# Altium PCB Guitar_Headphone_Amp.PcbDoc
Units mm, origin at the board's own origin, x right, y up, seen from the top; angles counter-clockwise.
Board outline 37.47 x 55.24 mm, 2 copper layers (Top Layer, Bottom Layer); 34 components, 23 nets, 93 pads, 6 vias.
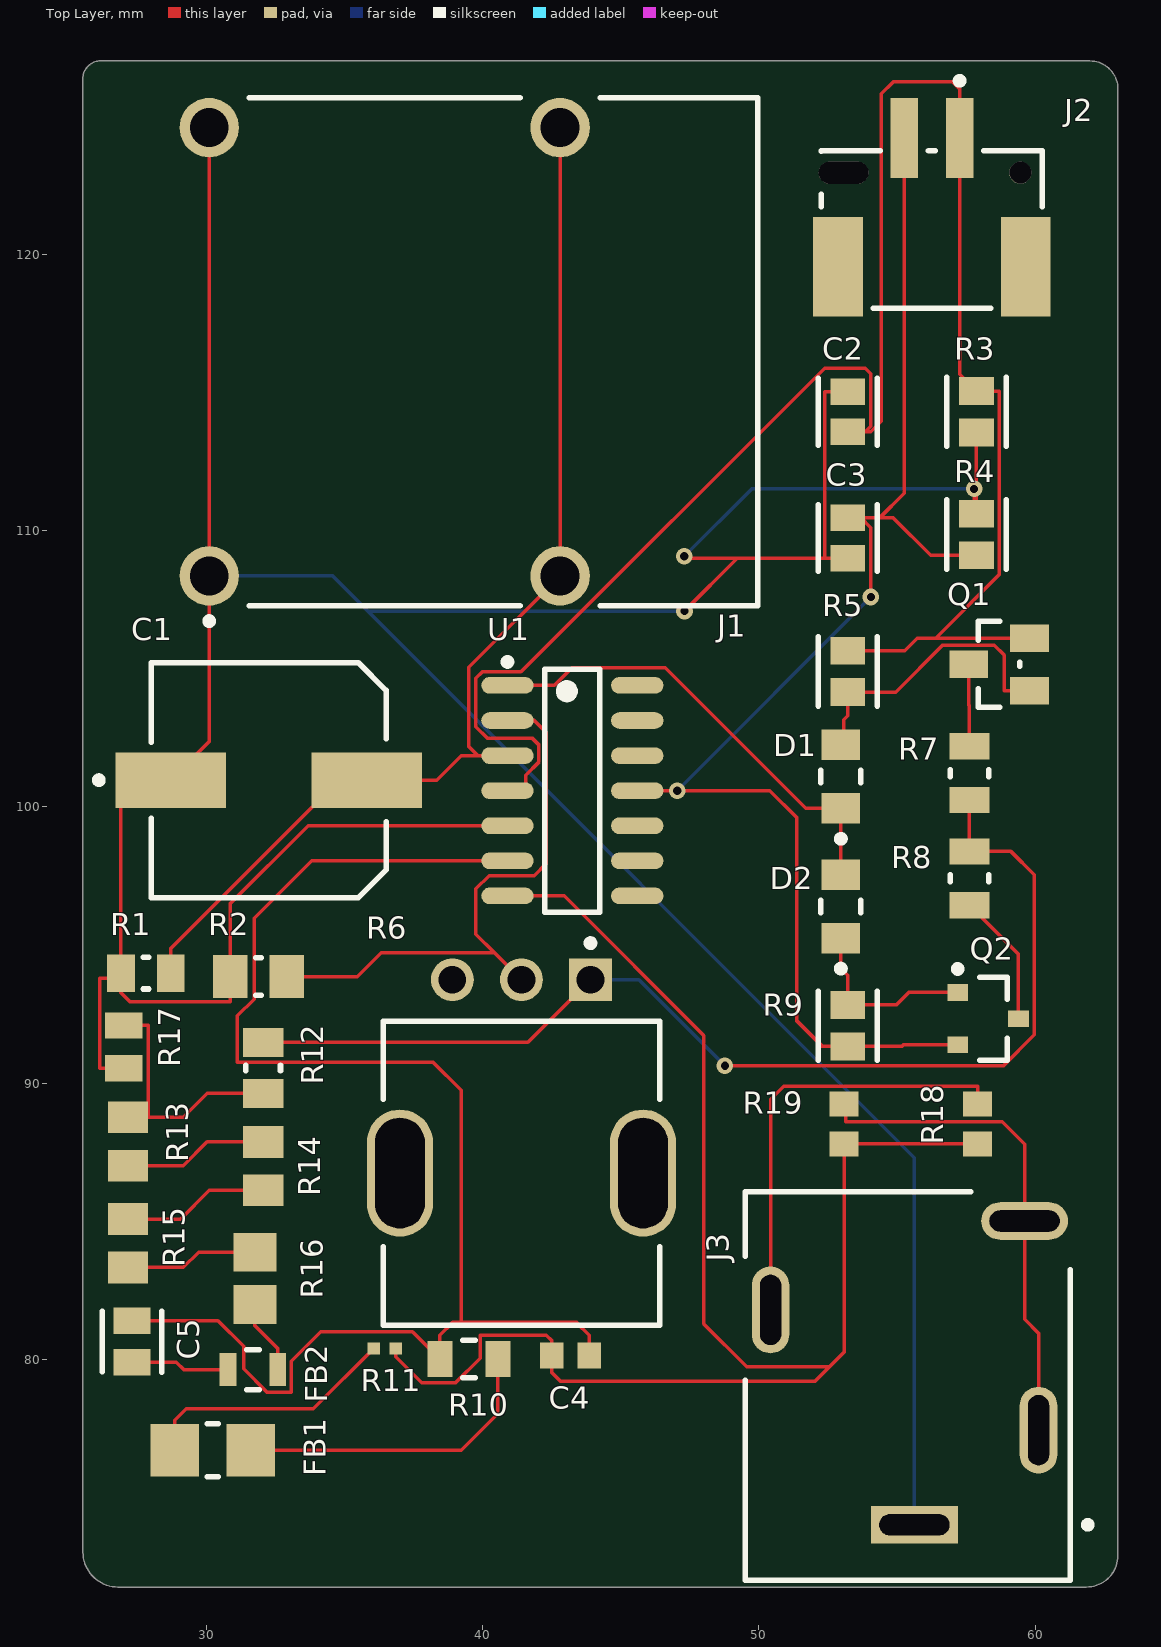
[diagram p0: Top Layer view]
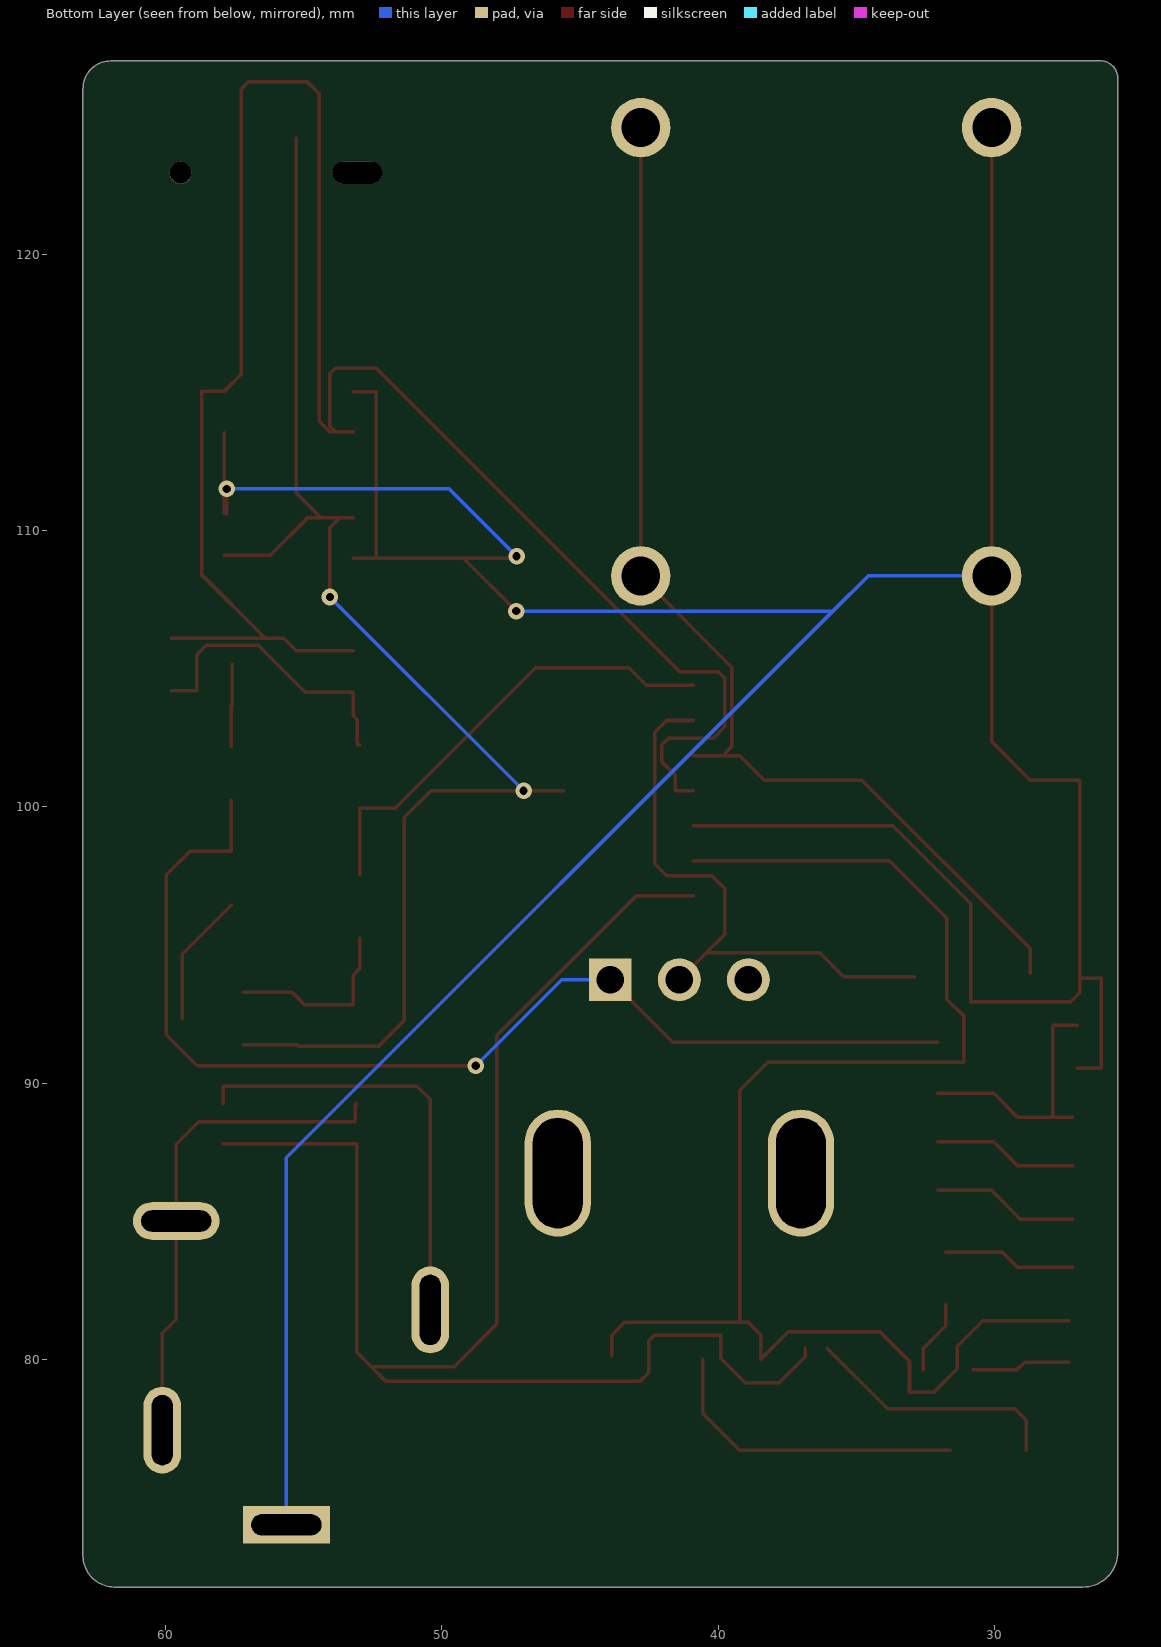
[diagram p1: Bottom Layer view, seen from below]
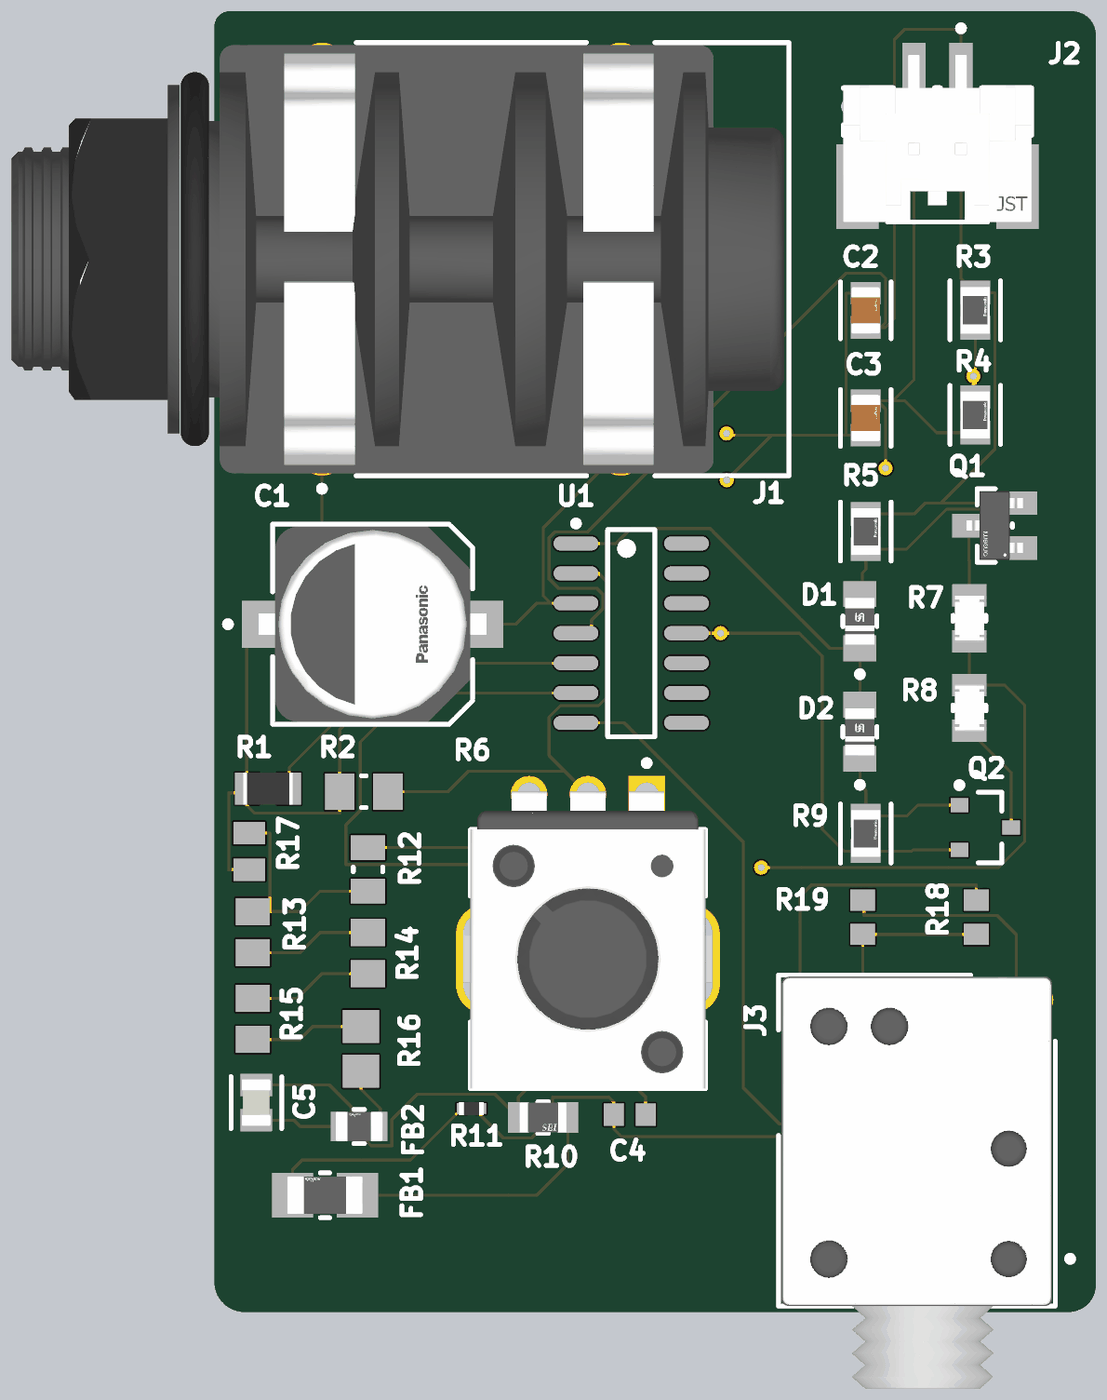
[diagram p2: 3D render of the assembled board from above, using the file's embedded part models]

## Layer stack, top to bottom
Top Solder: solder mask 0.0102, Solder Resist, Dk 3.5
Top Layer: signal copper 0.0356
Dielectric 1: dielectric 0.32, FR-4, Dk 4.8
Bottom Layer: signal copper 0.0356
Bottom Solder: solder mask 0.0102, Solder Resist, Dk 3.5

## Board outline
25.527,125.857 25.527,126.365 cw(c26.162,126.365) 26.162,127 26.797,127 61.976,127 cw(c61.976,125.984) 62.992,125.984 62.992,72.898 cw(c61.849,72.898) 61.849,71.755 26.797,71.755 cw(c26.797,73.025) 25.527,73.025

## Design rules (kind name [scope] priority, off if disabled: settings)
BoardOutlineClearance [All] p1: gap=0.1 ignorepadtopadclearanceinfootprint=FALSE
Clearance [All] p1: gap=0.127 ignorepadtopadclearanceinfootprint=FALSE except(0.25: Arc-Hole Track-Hole SMDPad-Hole THPad-Hole Via-Hole Fill-Hole Poly-Hole Region-Hole Text-Hole)
ComponentClearance [All] p1: gap=0.127 collisioncheckmode=3 verticalgap=0.127 showdistances=TRUE
DiffPairsRouting [All] p1: maxlimit=0.254 minlimit=0.127 mostfreqgap=0.127 toplayer_minwidth=0.127 toplayer_maxwidth=25.4 toplayer_prefwidth=0.127 bottomlayer_minwidth=0.127 bottomlayer_maxwidth=25.4 bottomlayer_prefwidth=0.127 maxuncoupledlength=12.7
Height [All] p1: minheight=0 maxheight=1816.048 prefheight=12.7
HoleSize [All] p1: absolutevalues=TRUE maxlimit=6.3 minlimit=0.3 maxpercent=80.000 minpercent=20.000
HoleToHoleClearance [All] p1: gap=0.25 allowstackedmicrovias=FALSE
MinimumAnnularRing [All] p1: minimumring=0.076
MinimumSolderMaskSliver [All] p1: minsoldermaskwidth=0
PlaneClearance [All] p1: clearance=0.127
PlaneConnect PlaneConnectPowerPads [InPadClass('PowerPads')] p1: planeconnectstyle=Direct reliefexpansion=0.508 reliefentries=4 reliefconductorwidth=0.254 reliefairgap=0.254
PlaneConnect [All] p2: pad.planeconnectstyle=Relief pad.reliefexpansion=0.3 pad.reliefentries=4 pad.reliefconductorwidth=0.127 pad.reliefairgap=0.127 via.planeconnectstyle=Direct via.reliefexpansion=0.3 via.reliefentries=4 via.reliefconductorwidth=0.127 via.reliefairgap=0.127
PolygonConnect PolygonConnectPowerPads [All vs (InPadClass('PowerPads'))] p1: connectstyle=Direct reliefconductorwidth=0.254 reliefentries=4 polygonreliefangle="90 Angle" airgapwidth=0.254
PolygonConnect [All] p2: thpad.connectstyle=Relief thpad.reliefconductorwidth=0.127 thpad.reliefentries=4 thpad.polygonreliefangle="90 Angle" thpad.airgapwidth=0.127 smdpad.connectstyle=Relief smdpad.reliefconductorwidth=0.127 smdpad.reliefentries=4 smdpad.polygonreliefangle="90 Angle" smdpad.airgapwidth=0.127 via.connectstyle=Direct via.reliefconductorwidth=0.127 via.reliefentries=4 via.polygonreliefangle="90 Angle" via.airgapwidth=0.127
RoutingVias [All] p1: holewidth=0.3 width=0.6 viastyle="Through Hole" minholewidth=0.3 minwidth=0.6 maxholewidth=0.6 maxwidth=6.6
SilkToSilkClearance [All] p1: silktosilkclearance=0
SilkToSolderMaskClearance [IsPad] p1: minsilkscreentomaskgap=0.127 clearancetoexposedcopper=TRUE
SolderMaskExpansion [All] p1: expansion=0.075 istentingtop=FALSE
Width [All] p1: maxlimit=25.4 minlimit=0.127 preferedwidth=0.127 minimp=50.000000 maximp=50.000000 favimp=50.000000
20 further rules are at their usual default settings.

## Classes and differential pairs
component class S?: J3 R18 R19
component class PA?: D1 D2 Q1 Q2 R5 R6 R7 R8 R9
component class P?: C2 C3 J2 R3 R4
component class F?: C4 C5 FB1 FB2 R10 R11 R12 R13 R14 R15 R16 R17
component class A?: C1 J1 R1 R2 U1

## Components (designator, comment, footprint, x,y, rotation, side; value= is the part's Value field where it differs from the comment)
C1 "220uF" FP-FTF-MFG 32.252,100.965 r0 top
C2 "10uF" FP-GRM21B-0_1-IPC_C 53.213,114.3 r90 top
C3 "10uF" FP-GRM21B-0_1-IPC_C 53.213,109.728 r90 top
C4 "1nF" CAPC1608X90X35NL10T15 43.18,80.137 r180 top
C5 "10uF" FP-C0805C-DG-MFG 27.305,80.645 r90 top
D1 "TS4148 RYG" FP-TS4148_RYG-MFG 52.963,101.092 r90 top
D2 "TS4148 RYG" FP-TS4148_RYG-MFG 52.963,96.393 r90 top
FB1 "800ohm" FP-BLM31-0_2-t1_6-IPC_A 30.226,76.708 r180 top
FB2 "30" FP-BLM21-0_2-t0_85-e0_5-d-MFG 31.679,79.629 r180 top
J1 "NMJ4HFD2" FP-NMJ4HFD2-MFG 33.324,116.472 r180 top
J2 "BM02B-PASS-1-TFT(LF)(SN)" FP-BM02B-PASS-1-TFT_LF_S-MFG 56.261,120.904 r0 top
J3 "35RAPC3BH3" FP-35RAPC3BH3-MFG 55.385,77.247 r90 top
Q1 "pnp" FP-318BM-MFG 58.693,105.156 r180 top
Q2 "npn" INF-SOT23_L 58.293,92.329 r0 top
R1 "10k" RESC2013X60X35NL10T20 27.805,93.98 r0 top
R2 "5k" RESC2013X50X30ML20T20 31.877,93.853 r0 top
R3 "1k" FP-ERA6A-IPC_C 57.868,114.3 r90 top
R4 "1k" FP-ERA6A-IPC_C 57.868,109.855 r90 top
R5 "1k" FP-ERA6A-IPC_C 53.213,104.902 r90 top
R6 "pot" FP-PTV09A-4-MFG 41.402,86.741 r180 top value=10kΩ
R7 "1" FP-CRCW0805-e3-MFG 57.618,101.219 r90 top
R8 "1" FP-CRCW0805-e3-MFG 57.618,97.409 r90 top
R9 "1k" FP-ERA6A-IPC_C 53.213,92.075 r90 top
R10 "7k" FP-RMCF0805-MFG 39.497,80.01 r0 top
R11 "100" RESC1005X40X25LL05T05 36.449,80.391 r0 top
R12 "5k" RESC2013X50X30NL20T20 32.054,90.551 r270 top
R13 "220" RESC2013X70X40NL20T20 27.155,87.884 r270 top
R14 "220" RESC2013X70X40NL20T20 32.054,86.995 r270 top
R15 "220" RESC2013X70X40NL20T20 27.155,84.201 r270 top
R16 "100" RESC2013X60X40ML20T25 31.754,82.931 r270 top
R17 "1k" RESC2013X70X40LL20T20 27.005,91.313 r90 top
R18 "470" RESC1608X55X30ML15T15 57.912,88.519 r90 top
R19 "470" RESC1608X55X30ML15T15 53.086,88.519 r90 top
U1 "op747" ADI-R-14_L 43.244,100.584 r0 top

## Footprints (in the part's own frame and the unit in brackets; to place one, negate y for a bottom-side part, rotate by r counter-clockwise, add the part's x,y. Pads: shape width x height; smd on the part's side, far side on the other; paste and mask are expansions set on the pad)
ADI-R-14_L [mm] "SOIC, 14-Leads, Body 8.65x3.9mm, Pitch 1.27mm, IPC High Density"
  oval 1.9x0.6 smd: 1(-2.35,3.81) 2(-2.35,2.54) 3(-2.35,1.27) 4(-2.35,0) 5(-2.35,-1.27) 6(-2.35,-2.54) 7(-2.35,-3.81) 8(2.35,-3.81) 9(2.35,-2.54) 10(2.35,-1.27) 11(2.35,0) 12(2.35,1.27) 13(2.35,2.54) 14(2.35,3.81)
  silkscreen extent -2.47,-4.4 1,4.78, body extent -2,-4.4 2,4.4, height 1.75
CAPC1608X90X35NL10T15 [mm] "Chip Capacitor, 2-Leads, Body 1.60x0.80mm, IPC Medium Density"
  rect 0.85x0.95 smd: 1(-0.675,0) 2(0.675,0)
  body extent -0.85,-0.45 0.85,0.45, height 0.9
FP-35RAPC3BH3-MFG [mil]
  rect 53.62x123.62 hole 100 slot 30 at 0 deg paste-39370.1 mask+0: 1(-127.5,-9.5)
  rrect100% 123.62x53.62 hole 100 slot 30 at 90 deg paste-39370.1 mask+0: 2(178.77,195.5) 5(7.37,-186.41)
  rrect100% 53.62x123.62 hole 100 slot 30 at 0 deg paste-39370.1 mask+0: 4(305.5,-166.5)
  silkscreen extent -207,-261 347,232, body extent -351,-235 351,235, height 10
FP-318BM-MFG [mm]
  rect 1.4x1 smd paste+0 mask+0: 1(-1.1,0.95) 2(-1.1,-0.95) 3(1.1,0)
  silkscreen extent -0.75,-1.56 0.75,1.56, body extent -1.9,-1.66 1.9,1.66, height 0.25
FP-BLM21-0_2-t0_85-e0_5-d-MFG [mm]
  rect 0.6x1.2 smd paste-1000 mask-1000: 1(-0.9,0) 2(0.9,0)
  silkscreen extent -0.22,-0.73 0.23,0.73, body extent -1.3,-0.82 1.3,0.82, height 0.25
FP-BLM31-0_2-t1_6-IPC_A [mm]
  rect 1.754x1.906 smd paste+0 mask+0: 1(-1.376,0) 2(1.376,0)
  silkscreen extent -0.2,-0.95 0.2,0.95, body extent -2.75,-1.45 2.75,1.45, height 0.25
FP-BM02B-PASS-1-TFT_LF_S-MFG [mm]
  rect 1x2.9 smd paste+0 mask+0: 1(1,3.3) 2(-1,3.3)
  rect 1.8x3.6 smd paste+0 mask+0: 3(-3.4,-1.35) 4(3.4,-1.35)
  rrect100% 1.8x0.8 hole 0.8 slot 1.8 at 0 deg unplated paste-1000 mask+0: ""(-3.2,2.05)
  round 0.8 hole 0.8 unplated paste-1000 mask+0: ""(3.2,2.05)
  silkscreen extent -4,-2.85 4,5.5, body extent -4.4,-3.25 4.4,4.85, height 0.25
FP-C0805C-DG-MFG [mm]
  rect 0.95x1.35 smd paste+0 mask+0: 1(-0.75,0) 2(0.75,0)
  silkscreen extent -1.11,-1.08 1.1,1.07, body extent -1.4,-0.85 1.4,0.85, height 0.25
FP-CRCW0805-e3-MFG [mm]
  rect 0.95x1.45 smd paste+0 mask+0: 1(-0.975,0) 2(0.975,0)
  silkscreen extent -0.13,-0.7 0.13,0.7, body extent -1.55,-0.82 1.55,0.82, height 0.25
FP-ERA6A-IPC_C [mm]
  rect 1.005x1.262 smd paste+0 mask+0: 1(-0.751,0) 2(0.751,0)
  silkscreen extent -1.25,-1.07 1.25,1.08, body extent -1.35,-0.77 1.35,0.77, height 0.25
FP-FTF-MFG [mm]
  rect 4x2 smd paste+0 mask+0: 1(-3.55,0) 2(3.55,0)
  silkscreen extent -6.27,-4.25 4.25,4.25, body extent -5.8,-4.5 5.8,4.5, height 0.25
FP-GRM21B-0_1-IPC_C [mm]
  rect 0.958x1.262 smd paste+0 mask+0: 1(-0.727,0) 2(0.727,0)
  silkscreen extent -1.21,-1.07 1.21,1.07, body extent -1.31,-0.77 1.31,0.77, height 0.25
FP-NMJ4HFD2-MFG [mm]
  round 2.15 hole 1.4 paste-1000 mask+0: S(3.225,8.115) SN(3.225,-8.115) T(-9.475,8.115) TN(-9.475,-8.115)
  silkscreen extent -16.62,-9.2 3.35,9.87, body extent -16.73,-9.3 16.73,9.3, height 0.25
FP-PTV09A-4-MFG [mm]
  rect 1.55x1.55 hole 1 paste-1000 mask+0: 1(-2.5,-7)
  round 1.55 hole 1 paste-1000 mask+0: 2(0,-7) 3(2.5,-7)
  rrect100% 2.4x4.6 hole 4 slot 1.8 at 0 deg paste-1000 mask+0: 4(-4.4,0) 5(4.4,0)
  silkscreen extent -5,-8.45 5,5.5, body extent -5.8,-7.88 5.8,5.6, height 0.25
FP-RMCF0805-MFG [mm]
  rect 0.9x1.3 smd paste+0 mask+0: 1(-1.05,0) 2(1.05,0)
  silkscreen extent -0.22,-0.67 0.22,0.67, body extent -1.6,-0.77 1.6,0.77, height 0.25
FP-TS4148_RYG-MFG [mm]
  rect 1.1x1.4 smd paste+0 mask+0: 1(-1.15,0) 2(1.15,0)
  silkscreen extent -2.37,-0.72 0.22,0.73, body extent -1.8,-0.82 1.8,0.82, height 0.25
INF-SOT23_L [mm] "SOT23, 3-Leads, Body 2.9x1.3 mm, Pitch 0.95 mm, IPC High Density"
  rect 0.75x0.6 smd: 1(-1.1,0.95) 2(-1.1,-0.95) 3(1.1,0)
  silkscreen extent -1.22,-1.5 0.7,1.92, body extent -0.7,-1.5 0.7,1.5, height 1.1
RESC1005X40X25LL05T05 [mm] "Chip Resistor, 2-Leads, Body 1.05x0.55mm, IPC High Density"
  rect 0.45x0.45 smd: 1(-0.4,0) 2(0.4,0)
  body extent -0.53,-0.28 0.53,0.28, height 0.4
RESC1608X55X30ML15T15 [mm] "Chip Resistor, 2-Leads, Body 1.75x0.95mm, IPC Low Density"
  rect 0.9x1.05 smd: 1(-0.725,0) 2(0.725,0)
  body extent -0.87,-0.48 0.87,0.48, height 0.55
RESC2013X50X30ML20T20 [mm] "Chip Resistor, 2-Leads, Body 2.00x1.25mm, IPC Low Density"
  rect 1.25x1.55 smd: 1(-1.025,0) 2(1.025,0)
  silkscreen extent -0.1,-0.67 0.1,0.67, body extent -1.1,-0.72 1.1,0.72, height 0.5
RESC2013X50X30NL20T20 [mm] "Chip Resistor, 2-Leads, Body 2.00x1.25mm, IPC Medium Density"
  rect 1.05x1.45 smd: 1(-0.925,0) 2(0.925,0)
  silkscreen extent -0.1,-0.63 0.1,0.62, body extent -1.1,-0.72 1.1,0.72, height 0.5
RESC2013X60X35NL10T20 [mm] "Chip Resistor, 2-Leads, Body 2.1x1.35mm, IPC Medium Density"
  rect 1x1.35 smd: 1(-0.9,0) 2(0.9,0)
  silkscreen extent -0.1,-0.58 0.1,0.58, body extent -1.05,-0.68 1.05,0.67, height 0.6
RESC2013X60X40ML20T25 [mm] "Chip Resistor, 2-Leads, Body 2.00x1.25mm, IPC Low Density"
  rect 1.4x1.55 smd: 1(-0.95,0) 2(0.95,0)
  body extent -1.1,-0.72 1.1,0.72, height 0.6
RESC2013X70X40LL20T20 [mm] "Chip Resistor, 2-Leads, Body 2.00x1.25mm, IPC High Density"
  rect 0.95x1.35 smd: 1(-0.775,0) 2(0.775,0)
  body extent -1.1,-0.72 1.1,0.72, height 0.7
RESC2013X70X40NL20T20 [mm] "Chip Resistor, 2-Leads, Body 2.00x1.25mm, IPC Medium Density"
  rect 1.15x1.45 smd: 1(-0.875,0) 2(0.875,0)
  body extent -1.1,-0.72 1.1,0.72, height 0.7

## Part data
C1: library part CMP-05427-000092-1, "CAP ALUM 220UF 20% 50V SMD", Case/Package=Radial, Dielectric Material=Aluminium, ESR (Equivalent Series Resistance)=180mR, Leakage Current=110uA, Max Operating Temperature=105°C, Min Operating Temperature=-55°C, Package Quantity=500, Ripple Current=670mA, Tolerance=20%, Voltage=50V, Capacitance=220uF, Construction=Cylindrical, Contact Plating=Tin, Diameter=8mm, Height=10.2mm, Height - Seated (Max)=0.413inch, Lead Diameter=0.9mm, Lead Free="Lead Free", Lead Pitch=3.1mm, Length=10.2mm, Life (Hours)=2000Hour, Mount="Surface Mount", Number of Pins=2, Packaging="Tape and Reel", Radiation Hardening=No, REACH SVHC="No SVHC", Ripple Current (AC)=670mA, RoHS Compliant=Yes, Series=FT, Termination=SMD/SMT, Voltage Rating=50V, Voltage Rating (DC)=50V
C2 C3: library part CMP-2007-03453-2, "Chip Multilayer Ceramic Capacitors for General Purpose, 0805, 10uF, X5R, 15%, 10%, 16V", Case Code (Imperial)=0805, Case Code (Metric)=2012, Dielectric=X5R, Max Operating Temperature=85°C, Min Operating Temperature=-55°C, Package Quantity=1, Tolerance=10%, Voltage=16V, Capacitance=10uF, Case/Package=0805, Depth=1.25mm, Height=1.25mm, Lead Free="Lead Free", Length=2mm, Material=Ceramic, Mount="Surface Mount", Packaging="Tape and Reel", Radiation Hardening=No, REACH SVHC="No SVHC", Termination=SMD/SMT, Thickness=0.053inch, Voltage Rating=16V, Voltage Rating (DC)=16V, Width=1.25mm
C4: library part CMP-2006-02891-1, Manufacturer=Murata, Part Number=GRM188R71H102KA01D
C5: library part CMP-2007-03243-2, "CAP CER 10UF 10V X5R 0805", 3DS Part Number=220-00001, Manufacturer=Kemet, Manufacturer Part Number=C0805C106K8PACTU, Package=C0805C-DG, Temperature="-55°C to +85°C", Temperature Characteristic=X5R, Temperature Coefficient=15%, Temperature Range High=+85°C, Temperature Range Low=-55°C, Tolerance=10%, Voltage=10V, Automotive=No, Capacitance=10uF, Category=Cap, ComponentLink2Description=Datasheet, ComponentLink2URL=https://content.kemet.com/datasheets/KEM_C1006_X5R_SMD.pdf, Device Class L1="Passive Components", Device Class L2=Capacitors, Device Class L3="Ceramic Capacitors", Digikey Description="CAP CER 10UF 10V X5R 0805", Height=1.4mm, Ipc Land Pattern Name=CAPC200125X125, Lead Free=Yes, Material=Ceramic, Mouser Description="CAP CER 10UF 10V X5R 0805", Octopart=https://octopart.com/c0805c106k8pactu-kemet-98697, RoHS=TRUE, Voltage Rating=10V
D1 D2: library part CMP-15605-000006-1, "Rectifier Diode Switching 75V 0.15A 4ns 2-Pin Case 0805(2012Metric) T/R", Case/Package=SMD/SMT, Forward Voltage=1V, Max Forward Surge Current (Ifsm)=2A, Max Operating Temperature=175°C, Max Repetitive Reverse Voltage (Vrrm)=75V, Min Operating Temperature=-65°C, Element Configuration=Single, Mount="Surface Mount", Number of Pins=2, Packaging="Tape and Reel", Peak Non-Repetitive Surge Current=2A, Radiation Hardening=No, Reverse Recovery Time=4ns, RoHS Compliant=Yes
FB1: library part CMP-06046-002102-1, "Chip Ferrite Bead, 1206, 800Ω @ 100MHz, 0.05Ω, 25%, 2.5A", Case Code (Imperial)=1206, Case Code (Metric)=3216, DC Resistance (DCR)=50mR, Max Current Rating=2.5A, Max Operating Temperature=125°C, Min Operating Temperature=-55°C, Ratings=AEC-Q200, Case/Package=1206, Mount="Surface Mount", Number of Lines=1, Packaging="Tape and Reel", RoHS Compliant=Yes
FB2: library part CMP-06046-001820-1, "Chip Ferrite Bead, 0805, 30Ω @ 100MHz, 0.014Ω, , 4A", Case Code (Imperial)=0805, Case Code (Metric)=2012, Current Rating=3A, DC Resistance (DCR)=14mR, DC Resistance-Max=15MR, Max Current Rating=4A, Max Operating Temperature=125°C, Min Operating Temperature=-55°C, Package Quantity=4000, Ratings=AEC-Q200, Test Frequency=100MHz, Tolerance=25%, Case/Package=0805, Core Material=Ferrite, Depth=1.45mm, Height=0.041inch, Impedance=30R, Lead Free="Lead Free", Length=2mm, Material=Steel, Max DC Current=3A, Mount="Surface Mount", Number of Circuits=1, Number of Lines=1, Packaging="Tape and Reel", REACH SVHC="No SVHC", RoHS Compliant=Yes, Series="EMIFIL®, BLM21P", Shielding=Unshielded, Termination=SMD/SMT, Weight=0.000194oz, Width=1.25mm
J1: library part CMP-78736-000001-1, "Conn 1/4\" Mono Jack F 3 POS Solder RA Thru-Hole 3 Terminal 1 Port", Current Rating=0.5A, Manufacturer=Neutrik, Package=0, Temperature="-25°C to +70°C", Temperature Range High=+70°C, Temperature Range Low=-25°C, Voltage Rating=50V, Automotive=No, Category=Conn, ComponentLink2Description=Datasheet, ComponentLink2URL=https://www.neutrik.com/en/product/nmj4hfd2.pdf, Conn Orientation=Horizontal, Contact Material=Silver, Device Class L1=Connectors, Device Class L2="Audio / Video Connectors", Device Class L3=unset, Footprint Url=https://www.neutrik.com/media/8576/download/st-nmj4hfd2.pdf?v=1, Height=15.89mm, Is Female=yes, Lead Free=Yes, Manufacturer Part Number=NMJ4HFD2, Mouser Description="Phone Audio Connector, Socket, 2, PCB Mount, Metal Body, Silver Plated Contacts", Number Of Contacts=2, Octopart=https://octopart.com/nmj4hfd2-neutrik-758952, RoHS=TRUE
J2: library part CMP-17439-000073-1, "CONN HEADER SMD 2POS 2MM", Color=Natural, Connector Type="Male Pin", Contact Material=Copper, Contact Plating=Tin, Contact Type="Male Pin", Fastening Type=Ramp, Gender=Male, Lead Free="Lead Free", Mount="Surface Mount", Number Of Contacts=2, Number of Positions=2, Number of Rows=1, Packaging="Tape and Reel", Pitch=0.079inch, Series=PA, Termination=Solder
J3: library part CMP-47983-000003-1, "CONN JACK STEREO 3.5MM R/A", Body Color=Black, Package Quantity=1, Voltage Rating=500V, Body Material=Brass, Color=Black, Contact Material="Copper Alloy", Contact Plating=Silver, Gender=Female, Housing Material=PBT, Lead Free="Lead Free", Mount="Through Hole", Number of Ports=1, Number of Positions=3, Number of Terminals/Pins=3, Orientation="Right Angle", Packaging=Bulk, RoHS Compliant=Yes, Series=35, Shielding=Unshielded, Termination=Solder
Q1: library part CMP-00278-84330287-1, "MMBTA56 Small Signal Bipolar Transistor, 0.5A I(C), 80V V(BR)CEO, 1-Element, PNP, Silicon", Collector Emitter Breakdown Voltage=80V, Current Rating=-500mA, Manufacturer Lifecycle Status=OBSOLETE, Power Dissipation=350mW, Voltage Rating (DC)=-80V, Lead Free="Lead Free", Lifecycle Status=Obsolete, NexarPartId=84330287, Number of Pins=3, Packaging=Digi-Reel®, Polarity=PNP, RoHS=Compliant, Schedule B="8541210080, 8541210080"
Q2: library part CMP-1177-00051-1, "NPN Silicon AF Transistor, 80 V VCEO, 500 mA IC, SOT23, Reel, Green", Manufacturer=Infineon, PartNumber=SMBTA06, ComponentLink1Description="Manufacturer URL", ComponentLink1URL=http://www.infineon.com/, ComponentLink2Description=Datasheet, ComponentLink2URL=http://www.infineon.com/dgdl/smbta06_mmbta06.pdf?folderId=db3a304314dca389011545f4eb561884&fileId=db3a304314dca3890115478ecca71a2d, ComponentLink3Description="Package Specification", ComponentLink3URL=http://www.infineon.com/dgdl/SOT23-Package_Overview.pdf?folderId=db3a30431936bc4b0119532290053c66&fileId=db3a30431936bc4b0119533468123c85, fT (typ)="100Â MHz", Green=TRUE, IBM (max)="200Â mA", IC="100Â mA", IC (max)="500Â mA", ICBO (max)="100Â nA", ICM (max)="1,000Â mA", Mounting Technology="Surface Mount", PackageDescription="3-Pin Small Outline Transistor Package, 1.3 x 2.9 mm Body, 0.95 mm Pitch", PackageReference=SOT23, PackageVersion=Apr-08, Packing=Reel, Polarity=NPN, Ptot (max)="330 mW", VCBO (max)="80Â V", VCE="1 V", VCEO (max)="80Â V", VEBO (max)="4Â V"
R1: library part CMP-1659-00013-4, "Chip Resistor, 10 KOhm, +/- 1%, 0.125 W, -55 to 155 degC, 0805 (2012 Metric), RoHS, Tape and Reel", Manufacturer=Yageo, Max Operating Temperature="155 degC", Min Operating Temperature="-55 degC", Package Quantity=5000, Voltage Rating="150 V", ComponentLink1Description="Manufacturer URL", ComponentLink1URL=http://www.yageo.com/, ComponentLink2Description=Datasheet, ComponentLink2URL=http://www.yageo.com/documents/recent/PYu-RC_Group_51_RoHS_L_04.pdf, DatasheetVersion="Rev. 4, 02/2016", Height="0.5 mm", Length="2 mm", Mount="Surface Mount", Mounting Technology="Surface Mount", PackageDescription="2-Pin Surface Mounted Device, Body 2 x 1.25 mm", PackageReference=0805, Packaging="Tape and Reel", Pins=2, REACH SVHC="No SVHC", RoHSCompliant=true
R2 R12: library part CMP-2001-04239-1, Manufacturer="Vishay Dale", Part Number=CRCW08055K00FKTA
R3 R4 R5 R9: library part CMP-2001-00581-2, "RES 1K OHM 0.1% 1/8W 0805", Case Code (Imperial)=0805, Case Code (Metric)=2012, Max Operating Temperature=155°C, Max Power Dissipation=125mW, Min Operating Temperature=-55°C, Package Quantity=5000, Resistance=1kR, Resistance Tolerance=0.1%, Resistor Type="Thin Film", Temperature Coefficient=25ppm/°C, Voltage Rating=100V, Case/Package=0805, Construction=Rectangular, Contact Plating=Tin, Depth=1.25mm, Height=0.5mm, Length=2mm, Military Standard=Not, Mount="Surface Mount", Number of Pins=2, Number of Terminations=2, Packaging="Tape and Reel", Power Rating=125mW, Radiation Hardening=No, REACH SVHC="No SVHC", RoHS Compliant=Yes, Series=ERA-6A, Technology="THIN FILM", Termination=SMD/SMT, Tolerance=0.1%, Width=1.25mm, Working Voltage=100V
R6: library part CMP-07234-000013-1, "POT 10K OHM 1/20W CARBON LINEAR", Manufacturer="Bourns Inc.", Manufacturer Part Number=PTV09A-4020U-B103, Package=PTV09A-4, Power Rating=0.05W, Resistance=10kΩ, Temperature="-10°C to +50°C", Temperature Range High=+50°C, Temperature Range Low=-10°C, Tolerance=20%, Voltage Rating=50V, Automotive=No, Category=Res, ComponentLink2Description=Datasheet, ComponentLink2URL=https://www.bourns.com/docs/product-datasheets/ptv09.pdf?sfvrsn=5e1089f1_12, Composition=Carbon, Device Class L1="Passive Components", Device Class L2=Resistors, Device Class L3="Variable Resistors and Potentiometers", Digikey Description="POT 10K OHM 1/20W CARBON LINEAR", Height=20.5mm, Lead Free=Yes, Mouser Description="Potentiometers 10K LINEAR 20%", Octopart=https://octopart.com/ptv09a-4020u-b103-bourns-1878033, RoHS=TRUE, Series=PTV09
R7 R8: library part CMP-2001-03649-2, "RES Thick Film, 1Ω, 1%, 0.125W, 100ppm/°C, 0805", Case Code (Imperial)=0805, Case Code (Metric)=2012, Max Operating Temperature=155°C, Max Power Dissipation=125mW, Min Operating Temperature=-55°C, Package Quantity=10, Resistance=1R, Temperature Coefficient=100ppm/°C, Tolerance=1%, Voltage Rating=150V, Case/Package=0805, Composition="Thick Film", Contact Plating=Tin, Depth=1.25mm, Features="Automotive AEC-Q200", Height=0.02inch, Length=2mm, Military Standard=Not, Mount="Surface Mount", Number of Pins=2, Number of Terminations=2, Packaging="Tape and Reel", Power Rating=125mW, Radiation Hardening=No, Termination=SMD/SMT, Weight=0.000194oz, Width=0.049inch
R10: library part CMP-26527-003538-1, "4.7kΩ ±5% 0.125W 0805 Thick Film Chip Resistor AEC-Q200 compliant", Case Code (Imperial)=0805, Case Code (Metric)=2012, Max Operating Temperature=155°C, Max Power Dissipation=125mW, Min Operating Temperature=-55°C, Resistance=4.7kR, Resistor Type="Thick Film", Temperature Coefficient=100ppm/°C, Tolerance=5%, Case/Package=0805, Construction=Rectangular, Contact Plating=Tin, Depth=1.25mm, Features="Automotive AEC-Q200", Height=0.026inch, Lead Free="Lead Free", Length=2mm, Military Standard=Not, Mount="Surface Mount", Number of Terminations=2, Packaging="Tape and Reel", Power Rating=125mW, Radiation Hardening=No, RoHS Compliant=Yes, Series=RMCF, Size Code=0805, Width=0.049inch
R11: library part CMP-2002-00605-3, "Chip Resistor, 100 Ohm, +/- 1%, 100 mW, -55 to 155 degC, 0402 (1005 Metric), RoHS, Tape and Reel", Case Code (Imperial)=0402, Case Code (Metric)=1005, Manufacturer="Basic Passives", Max Operating Temperature="155 degC", Min Operating Temperature="-55 degC", Package Quantity=10000, PartNumber=ERJ-2RKF1000X, Power Rating="100 mW", Resistance="100 Ohm", Tolerance=1%, Voltage Rating="50 V", Case\/Package=0402, ComponentLink1Description="Manufacturer URL", ComponentLink1URL=http://www.panasonic.com/, ComponentLink2Description=Datasheet, ComponentLink2URL=http://industrial.panasonic.com/cdbs/www-data/pdf/RDA0000/AOA0000C86.pdf, DatasheetVersion=04/2015, Height="0.35 mm", Length="1 mm", Mount="Surface Mount", Mounting Technology="Surface Mount", PackageDescription="2-Pin Surface Mount Device, Body 1 x 0.5 mm", PackageReference=0402, Packaging="Tape and Reel", Pins=2, Radiation Hardening=No, REACH SVHC=Yes, RoHSCompliant=true, Width="0.5 mm"
R13 R14 R15: library part CMP-2001-00044-1, Manufacturer=Panasonic, Part Number=ERJ6ENF2200V
R16: library part CMP-2001-00580-1, Manufacturer=Panasonic, Part Number=ERA6AEB101V
R17: library part CMP-2001-04375-5, "Chip Resistor, 1 KOhm, +/- 1%, 0.125 W, -55 to 155 degC, 0805 (2012 Metric), RoHS, Tape and Reel", Manufacturer=Panasonic, Max Operating Temperature="155 degC", Min Operating Temperature="-55 degC", Package Quantity=1, Voltage Rating="150 V", ComponentLink1Description="Manufacturer URL", ComponentLink1URL=http://www.panasonic.com/, ComponentLink2Description=Datasheet, ComponentLink2URL=http://industrial.panasonic.com/cdbs/www-data/pdf/RDA0000/AOA0000C86.pdf, DatasheetVersion=04/2015, Height="0.6 mm", Length="2 mm", Mount="Surface Mount", Mounting Technology="Surface Mount", PackageDescription="2-Pin Surface Mount Device, Body 2 x 1.25 mm", PackageReference=0805, Packaging="Cut Tape", REACH SVHC=Yes, RoHSCompliant=true
R18 R19: library part CMP-1012-00473-6, "Chip Resistor, 470 Ohm, +/- 1%, 0.1 W, -55 to 155 degC, 0603 (1608 Metric), RoHS, Tape and Reel", Manufacturer=Panasonic, Max Operating Temperature="155 degC", Min Operating Temperature="-55 degC", Package Quantity=1, Voltage Rating="75 V", ComponentLink1Description="Manufacturer URL", ComponentLink1URL=http://www.panasonic.com/, ComponentLink2Description=Datasheet, ComponentLink2URL=http://industrial.panasonic.com/cdbs/www-data/pdf/RDA0000/AOA0000C86.pdf, ComponentLink3Description="Package Specification", ComponentLink3URL=https://datasheet.ciiva.com/11808/0900766b80f806dd-11808207.pdf, DatasheetVersion=04/2015, Height="0.45 mm", Length="1.6 mm", Mount="Surface Mount", Mounting Technology="Surface Mount", PackageDescription="2-Pin Surface Mount Device, Body 1.6 x 0.85 mm", PackageReference=0603, Packaging="Tape and Reel", Pins=2, REACH SVHC=Yes, RoHSCompliant=true
U1: library part CMP-0384-00387-1, "Quad Channel Rail-to-Rail Operational Amplifier, 700 KHz BW, 200 mV/us SR, Industrial, 14-pin SOIC (R-14), Reel", Amplifiers Per Package=4, Generic Part Number=OP747, Input Bias Current=5.5nA, Input Offset Voltage=30uV, Manufacturer="Analog Devices", PartNumber=OP747ARZ-REEL7, Code_JEDEC=MS-012-AB, ComponentLink1Description="Manufacturer URL", ComponentLink1URL=http://www.analog.com/en/index.html, ComponentLink2Description=Datasheet, ComponentLink2URL=http://www.analog.com/static/imported-files/data_sheets/OP777_727_747.pdf, ComponentLink3Description="Package Specification", ComponentLink3URL=http://www.analog.com/static/imported-files/packages/PKG_PDF/SOIC_Narrow%20(R)/R_14.pdf, DatasheetVersion="Rev. D", Iq/Amp=290uA, Mounting Technology="Surface Mount", PackageDescription="14-Pin Standard Small Outline Package, Body 8.65 x 3.9 mm, Pitch 1.27 mm", PackageReference=R-14, PackageVersion=060606-A, Slew Rate=200mV/us, Small Signal Bandwidth=700KHz, V Span Max=36V, V Span Min=3V

## Via types
v1: diameter 0.6, hole 0.3, Top Layer to Bottom Layer, 6 vias

## Nets (pads, with @x,y where several pads share a name; then routed paths per layer and width w, separated by ;. In a path a pad name is that pad's centre, name@x,y a point inside that pad or via, vN(x,y) a via of type N, cw(c..) or ccw(c..) an arc to the next point about the centre after c; other vN are vias at no path point)
+4.5V: C2.1 J2.1 Q1.2 R3.2 R5.2 U1.4 | length 73.1
  Top Layer w0.127: U1.4 41.554,100.584 41.554,101.143 42.035,101.623 42.035,102.237 41.783,102.489 40.157,102.489 39.753,102.893 39.753,104.648 39.99,104.885 41.385,104.885 52.375,115.875 53.848,115.875 54.051,115.672 54.051,113.776 53.848,113.573 ; R5.2 55.27,105.653 55.724,106.106 56.398,106.106 ; C2.1 53.848,113.573 ; Q1.2 56.398,106.106 ; 53.848,113.573 54.051,113.573 54.432,113.954 54.432,125.806 54.864,126.238 57.007,126.238 57.261,125.984 J2.1 57.261,115.658 R3.2 58.699,115.051 58.699,108.407 56.398,106.106
-4.5V: C3.2 J2.2 Q2.2 R4.1 R9.1 U1.11 | length 52
  Top Layer w0.127: U1.11 v1(47.041,100.584) 50.394,100.584 51.359,99.619 51.359,92.264 52.299,91.324 R9.1 55.169,91.324 55.224,91.379 Q2.2 ; C3.2 C3.2@53.696,110.455 ; v1(54.051,107.594) 54.051,110.1 C3.2@53.696,110.455 ; J2.2 55.261,111.354 54.363,110.455 ; R4.1 56.215,109.104 54.864,110.455 54.363,110.455 ; C3.2@53.696,110.455 54.363,110.455
  Bottom Layer w0.127: v1(47.041,100.584) v1(54.051,107.594)
GND: C1.1 C2.2 C3.1 J1.S J1.SN J3.1 R1.1 R2.1 R3.1 R4.2 R17.1 U1.5 | length 147.4
  Top Layer w0.127: R17.1 26.137,90.538 26.137,93.802 R1.1@26.905,93.802 ; J1.SN J1.S 30.099,102.362 C1.1 26.905,100.965 R1.1 R1.1@26.905,93.802 ; U1.5 33.68,99.314 30.852,96.486 R2.1 30.852,92.939 27.229,92.939 26.905,93.262 R1.1@26.905,93.802 ; v1(47.295,109.068) 47.295,109.001 49.219,109.001 ; v1(47.304,107.086) 49.219,109.001 ; C3.1 52.375,109.001 ; C2.2 52.375,115.027 52.375,109.001 ; v1(57.785,111.506) 57.785,110.606 R4.2 R3.1 ; 49.219,109.001 52.375,109.001
  Bottom Layer w0.127: J1.S 34.569,108.357 35.839,107.086 ; v1(47.295,109.068) 49.733,111.506 v1(57.785,111.506) ; v1(47.304,107.086) 35.839,107.086 ; J3.1 55.626,87.3 35.839,107.086
NetC1_2: C1.2 J1.T J1.TN R1.2 U1.3 | length 40.2
  Top Layer w0.127: R1.2 28.705,94.872 34.798,100.965 C1.2 38.329,100.965 39.218,101.854 39.827,101.854 ; U1.3 39.827,101.854 ; J1.TN J1.T 39.499,105.057 39.499,102.182 39.827,101.854
NetC4_1: C4.1 C5.2 R10.1 U1.6 | length 54.5
  Top Layer w0.127: C5.2 30.416,81.395 31.344,80.467 31.344,79.654 32.182,78.816 33.071,78.816 33.071,79.934 34.138,81.001 37.456,81.001 R10.1 38.447,80.874 38.906,81.333 39.218,81.333 ; U1.6 33.807,98.044 31.725,95.961 31.725,93.04 31.115,92.431 31.115,90.754 38.202,90.754 39.218,89.738 39.218,81.333 ; C4.1 43.855,80.874 43.396,81.333 39.218,81.333
NetC4_2: C4.2 R11.2 R18.1 R19.1 U1.7 | length 57.1
  Top Layer w0.127: R11.2 36.849,80.093 37.795,79.146 39.014,79.146 39.903,80.035 39.903,80.874 42.302,80.874 42.505,80.67 C4.2 42.505,79.517 42.824,79.197 52.019,79.197 52.553,79.731 ; U1.7 42.951,96.774 48.006,91.719 48.006,81.28 49.555,79.731 52.553,79.731 ; R18.1 R19.1 53.086,80.264 52.553,79.731
NetC5_1: C5.1 FB2.2 | length 3.6
  Top Layer w0.127: C5.1 28.905,79.895 29.171,79.629 FB2.2
NetD1_1: D1.1 D2.2 U1.1 | length 16.8
  Top Layer w0.127: U1.1 42.596,104.394 43.231,105.029 46.602,105.029 51.689,99.942 D1.1 D2.2
NetD1_2: D1.2 Q1.1 R5.1 | length 10.8
  Top Layer w0.127: D1.2 53.067,102.242 53.067,103.152 53.213,103.298 R5.1 54.944,104.151 56.642,105.849 58.522,105.849 58.877,105.494 58.877,104.206 Q1.1
NetD2_1: D2.1 Q2.1 R9.2 | length 6.7
  Top Layer w0.127: D2.1 52.963,94.154 53.213,93.904 R9.2 54.966,92.826 55.419,93.279 Q2.1
NetFB1_1: FB1.1 R10.2 | length 11.5
  Top Layer w0.127: FB1.1 39.226,76.708 40.547,78.029 R10.2
NetFB1_2: FB1.2 R11.1 | length 9.4
  Top Layer w0.127: FB1.2 28.85,77.796 29.261,78.207 33.865,78.207 R11.1
NetFB2_1: FB2.1 R16.2 | length 2.7
  Top Layer w0.127: R16.2 31.754,81.216 32.579,80.391 FB2.1
NetJ3_2: J3.2 R18.2 | length 16
  Top Layer w0.127: J3.2 50.419,89.408 50.902,89.891 57.912,89.891 R18.2
NetJ3_4: J3.4 J3.5 R19.2 | length 18.1
  Top Layer w0.127: R19.2 53.137,89.244 53.137,88.595 58.801,88.595 59.614,87.782 J3.4 59.614,81.456 60.12,80.95 J3.5
NetQ1_3: Q1.3 R7.2 | length 3
  Top Layer w0.127: Q1.3 57.593,103.682 57.618,103.657 R7.2
NetQ2_3: Q2.3 R8.1 | length 4.8
  Top Layer w0.127: R8.1 59.393,94.659 Q2.3
NetR2_2: R2.2 R6.2 U1.2 | length 21.1
  Top Layer w0.127: R2.2 35.458,93.853 36.322,94.717 40.426,94.717 ; U1.2 41.859,103.124 42.291,102.692 42.291,97.942 41.859,97.511 40.234,97.511 39.751,97.028 39.751,95.392 40.426,94.717 ; R6.2 40.426,94.717
NetR6_1: R6.1 R7.1 R8.2 R12.1 | length 41
  Top Layer w0.127: R12.1 41.637,91.476 R6.1 ; v1(48.768,90.627) 58.852,90.627 59.969,91.745 59.969,97.536 59.121,98.384 R8.2 R7.1
  Bottom Layer w0.127: R6.1 45.654,93.741 v1(48.768,90.627)
NetR12_2: R12.2 R13.1 R17.2 | length 9.5
  Top Layer w0.127: R17.2 27.889,92.088 27.889,88.759 ; R13.1 27.889,88.759 ; R12.2 30.026,89.626 29.159,88.759 27.889,88.759
NetR13_2: R13.2 R14.1 | length 5.3
  Top Layer w0.127: R13.2 29.159,87.009 30.02,87.87 R14.1
NetR14_2: R14.2 R15.1 | length 5.3
  Top Layer w0.127: R15.1 29.058,85.076 30.102,86.12 R14.2
NetR15_2: R15.2 R16.1 | length 4.8
  Top Layer w0.127: R15.2 29.159,83.326 29.714,83.881 R16.1
pads on no net: J2. J2.3 J2.4 R6.3 R6.4 R6.5 U1.8 U1.9 U1.10 U1.12 U1.13 U1.14

## Silkscreen, mask and mechanical layers (free items; w line width, h text height)
Mechanical 1:
  lines w0.1: 62.985,72.772 cw(c61.849,72.898) 61.849,71.755 61.595,71.755 26.797,71.755 cw(c26.797,73.025) 25.527,73.025 25.527,125.857 25.527,126.365 ; 62.992,72.898 62.992,125.603 62.992,125.984 ccw(c61.976,125.984) 61.976,127 26.797,127 26.162,127 ccw(c26.162,126.365) 25.527,126.365 ; 25.527,126.365 ccw(c25.527,126.365) 25.527,126.365